# Altium PCB loight_sensor.PcbDoc
Units mm, origin at the board's own origin, x right, y up, seen from the top; angles counter-clockwise.
Board outline 33 x 15 mm, 2 copper layers (Top Layer, Bottom Layer); 6 components, 4 nets, 15 pads, 0 vias.
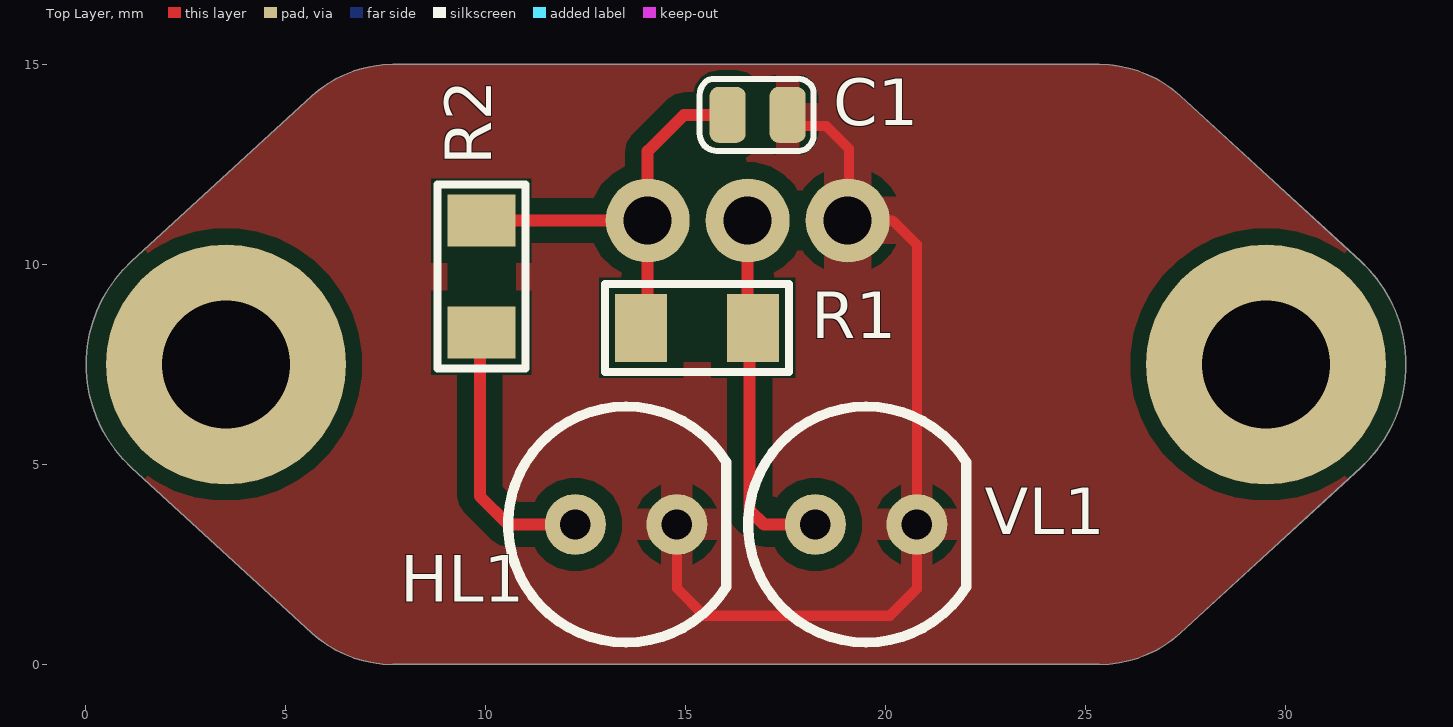
[diagram p0: Top Layer view]
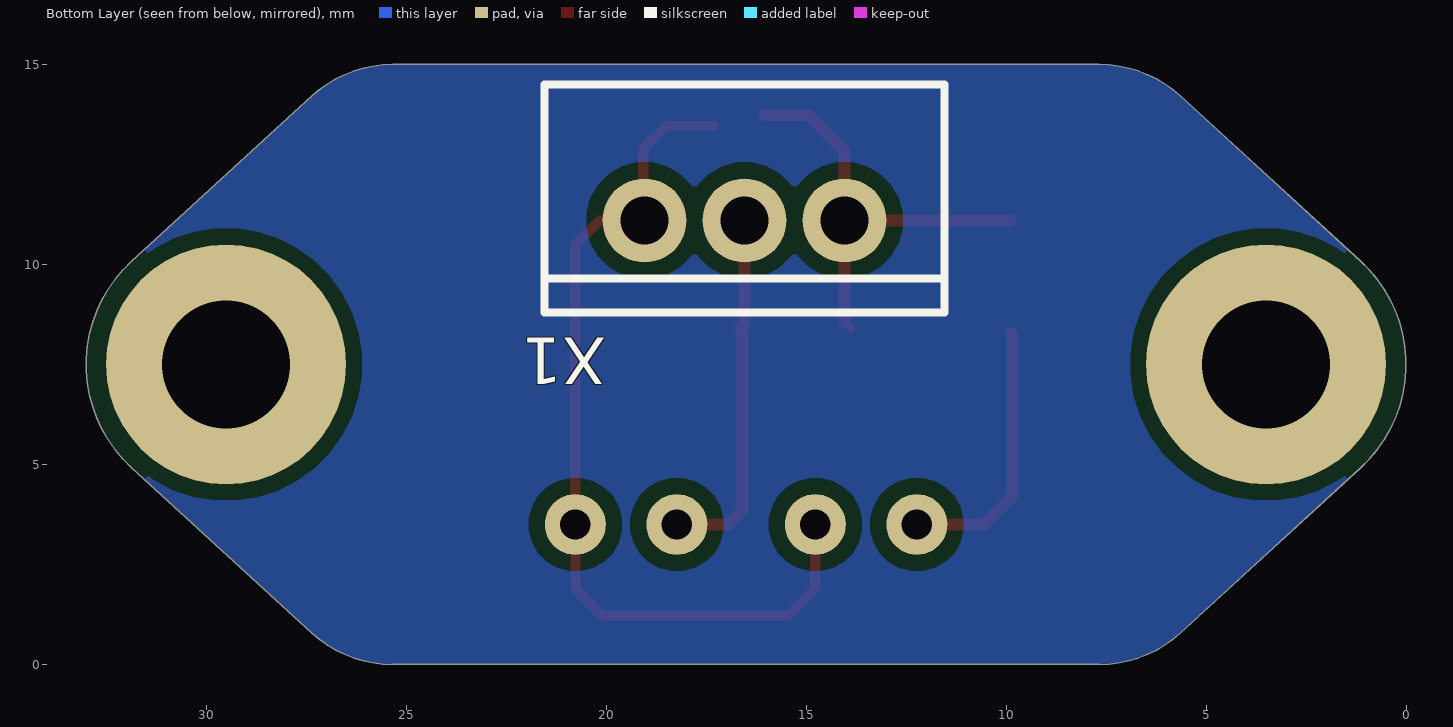
[diagram p1: Bottom Layer view, seen from below]
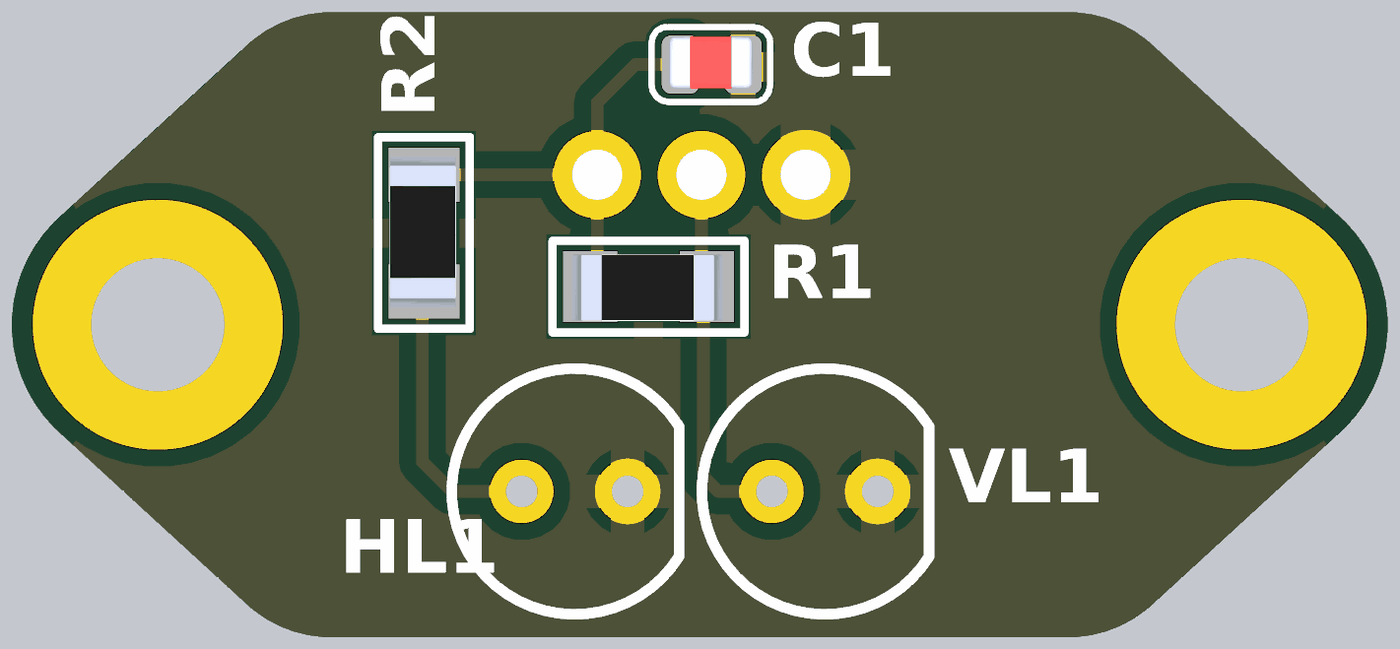
[diagram p2: 3D render of the assembled board from above, using the file's embedded part models]

## Layer stack, top to bottom
Top Solder: solder mask 0.0102, Solder Resist, Dk 3.5
Top Layer: signal copper 0.0356
Dielectric 1: dielectric 0.32, FR-4, Dk 4.8
Bottom Layer: signal copper 0.0356
Bottom Solder: solder mask 0.0102, Solder Resist, Dk 3.5

## Board outline
5.646,0.795 ccw(c7.674,3.006) 7.674,0.006 25.339,0.006 ccw(c25.339,3.006) 27.367,0.795 31.872,4.927 ccw(c29.506,7.506) 31.872,10.086 27.367,14.217 ccw(c25.339,12.006) 25.339,15.006 7.674,15.006 ccw(c7.674,12.006) 5.646,14.217 1.141,10.086 ccw(c3.506,7.506) 1.141,4.927

## Design rules (kind name [scope] priority, off if disabled: settings)
Clearance Clearance_1 [IsPadHoleValid] p1: gap=0.4 ignorepadtopadclearanceinfootprint=FALSE except(0.2: Arc-Arc Arc-Track Arc-SMDPad Arc-THPad Arc-Hole Track-Track Track-SMDPad Track-THPad Track-Hole SMDPad-Hole THPad-Hole Fill-Hole Poly-Hole Region-Hole Text-Text Text-Hole)
Clearance Clearance_Edge_Mid [((OnLayer('Signal Layer 1') OR OnLayer('Signal Layer 2')OR OnLayer('Signal Layer 3')OR OnLayer('Signal Layer 4'))) vs (OnLayer('Keep-Out Layer'))] p2: gap=0.25 ignorepadtopadclearanceinfootprint=FALSE
Clearance Clearance_Edge [All vs (OnLayer('Keep-Out Layer'))] p3: gap=0.25 ignorepadtopadclearanceinfootprint=FALSE
Clearance Via [IsVia vs IsVia] p4: gap=0.2 ignorepadtopadclearanceinfootprint=FALSE
Clearance Clearance_Poly_top [InPolygon AND (OnLayer('Top Layer') OR OnLayer('Bottom Layer'))] p5: gap=0.4 ignorepadtopadclearanceinfootprint=FALSE
Clearance Clearance_Poly_Mid [InPolygon AND (OnLayer('Signal Layer 1') OR OnLayer('Signal Layer 2') OR OnLayer('Signal Layer 3') OR OnLayer('Signal Layer 4'))] p6: gap=0.3 ignorepadtopadclearanceinfootprint=FALSE except(0.2: Via-Fill Via-Poly Via-Region)
Clearance [All] p7: gap=0.2 ignorepadtopadclearanceinfootprint=FALSE
ComponentClearance [All] p1: gap=0 collisioncheckmode=3 verticalgap=0 showdistances=FALSE
DiffPairsRouting [All] p1: maxlimit=0.254 minlimit=0.1 mostfreqgap=0.2 toplayer_minwidth=0.1 toplayer_maxwidth=0.381 toplayer_prefwidth=0.1 bottomlayer_minwidth=0.1 bottomlayer_maxwidth=0.381 bottomlayer_prefwidth=0.1 maxuncoupledlength=12.7
Height [All] p1: minheight=0 maxheight=30 prefheight=0
HoleSize [All] p1: absolutevalues=TRUE maxlimit=10 minlimit=0.2 maxpercent=80.000 minpercent=20.000
HoleToHoleClearance [All] p1: gap=0.2 allowstackedmicrovias=TRUE
MatchedLengths MatchedLengths_CSI2 [InDifferentialPairClass('MIPI_TX')] p1: tolerance=1 checknetsindiffpair=FALSE checkdiffpairvsdiffpair=TRUE checkxsignals=TRUE checkothers=TRUE
MatchedLengths MatchedLengths_CSI1 [InDifferentialPairClass('MIPI_CSI23')] p2: tolerance=1 checknetsindiffpair=FALSE checkdiffpairvsdiffpair=TRUE checkxsignals=TRUE checkothers=TRUE
MatchedLengths MatchedLengths_CSI0 [InDifferentialPairClass('MIPI_CSI0')] p3: tolerance=1 checknetsindiffpair=FALSE checkdiffpairvsdiffpair=TRUE checkxsignals=TRUE checkothers=TRUE
MatchedLengths [InDifferentialPairClass('All Differential Pairs')] p4: tolerance=0.5 checknetsindiffpair=TRUE checkdiffpairvsdiffpair=FALSE checkxsignals=FALSE checkothers=FALSE
MinimumSolderMaskSliver [All] p1: minsoldermaskwidth=0.05
PlaneClearance [All] p1: clearance=0.5
PlaneConnect [All] p1: planeconnectstyle=Relief reliefexpansion=0.5 reliefentries=4 reliefconductorwidth=0.2 reliefairgap=0.2
PolygonConnect PolygonConnect_<=0.3 [(AsMM(PadXSize_AllLayers)<=0.301) or (AsMM(PadYSize_AllLayers)<=0.301)] p1: thpad.connectstyle=Relief thpad.reliefconductorwidth=0.2 thpad.reliefentries=4 thpad.polygonreliefangle="90 Angle" thpad.airgapwidth=0.2 smdpad.connectstyle=Relief smdpad.reliefconductorwidth=0.2 smdpad.reliefentries=4 smdpad.polygonreliefangle="90 Angle" smdpad.airgapwidth=0.2 via.connectstyle=Direct via.reliefconductorwidth=0.2 via.reliefentries=4 via.polygonreliefangle="90 Angle" via.airgapwidth=0.2
PolygonConnect PolygonConnect_<=0.4 [(AsMM(PadXSize_AllLayers)<=0.401) or (AsMM(PadYSize_AllLayers)<=0.401)] p2: thpad.connectstyle=Relief thpad.reliefconductorwidth=0.26 thpad.reliefentries=4 thpad.polygonreliefangle="90 Angle" thpad.airgapwidth=0.2 smdpad.connectstyle=Relief smdpad.reliefconductorwidth=0.26 smdpad.reliefentries=4 smdpad.polygonreliefangle="90 Angle" smdpad.airgapwidth=0.2 via.connectstyle=Direct via.reliefconductorwidth=0.26 via.reliefentries=4 via.polygonreliefangle="90 Angle" via.airgapwidth=0.2
PolygonConnect PolygonConnect_<=0.6 [(AsMM(PadXSize_AllLayers)<=0.601) or (AsMM(PadYSize_AllLayers)<=0.601)] p3: thpad.connectstyle=Relief thpad.reliefconductorwidth=0.33 thpad.reliefentries=4 thpad.polygonreliefangle="90 Angle" thpad.airgapwidth=0.2 smdpad.connectstyle=Relief smdpad.reliefconductorwidth=0.33 smdpad.reliefentries=4 smdpad.polygonreliefangle="90 Angle" smdpad.airgapwidth=0.2 via.connectstyle=Direct via.reliefconductorwidth=0.33 via.reliefentries=4 via.polygonreliefangle="90 Angle" via.airgapwidth=0.2
PolygonConnect PolygonConnect_<=0.8 [(AsMM(PadXSize_AllLayers)<=0.8)or(AsMM(PadYSize_AllLayers)<=0.8)] p4: thpad.connectstyle=Relief thpad.reliefconductorwidth=0.53 thpad.reliefentries=4 thpad.polygonreliefangle="90 Angle" thpad.airgapwidth=0.3 smdpad.connectstyle=Relief smdpad.reliefconductorwidth=0.53 smdpad.reliefentries=4 smdpad.polygonreliefangle="90 Angle" smdpad.airgapwidth=0.3 via.connectstyle=Direct via.reliefconductorwidth=0.53 via.reliefentries=4 via.polygonreliefangle="90 Angle" via.airgapwidth=0.3
PolygonConnect PolygonConnect_<=1 [(AsMM(PadXSize_AllLayers)<=1.01)or(AsMM(PadYSize_AllLayers)<=1.01)] p5: thpad.connectstyle=Relief thpad.reliefconductorwidth=0.6 thpad.reliefentries=4 thpad.polygonreliefangle="90 Angle" thpad.airgapwidth=0.3 smdpad.connectstyle=Relief smdpad.reliefconductorwidth=0.6 smdpad.reliefentries=4 smdpad.polygonreliefangle="90 Angle" smdpad.airgapwidth=0.3 via.connectstyle=Direct via.reliefconductorwidth=0.6 via.reliefentries=4 via.polygonreliefangle="90 Angle" via.airgapwidth=0.3
PolygonConnect PolygonConnect_<=1.3 [(AsMM(PadXSize_AllLayers)<=1.31)or(AsMM(PadYSize_AllLayers)<=1.31)] p6: thpad.connectstyle=Relief thpad.reliefconductorwidth=0.66 thpad.reliefentries=4 thpad.polygonreliefangle="90 Angle" thpad.airgapwidth=0.3 smdpad.connectstyle=Relief smdpad.reliefconductorwidth=0.66 smdpad.reliefentries=4 smdpad.polygonreliefangle="90 Angle" smdpad.airgapwidth=0.3 via.connectstyle=Direct via.reliefconductorwidth=0.66 via.reliefentries=4 via.polygonreliefangle="90 Angle" via.airgapwidth=0.3
PolygonConnect PolygonConnect_<=1.6 [(AsMM(PadXSize_AllLayers)<=1.61)or(AsMM(PadYSize_AllLayers)<=1.61)] p7: thpad.connectstyle=Relief thpad.reliefconductorwidth=0.8 thpad.reliefentries=4 thpad.polygonreliefangle="90 Angle" thpad.airgapwidth=0.3 smdpad.connectstyle=Relief smdpad.reliefconductorwidth=0.8 smdpad.reliefentries=4 smdpad.polygonreliefangle="90 Angle" smdpad.airgapwidth=0.3 via.connectstyle=Direct via.reliefconductorwidth=0.8 via.reliefentries=4 via.polygonreliefangle="90 Angle" via.airgapwidth=0.3
PolygonConnect PolygonConnect_<=1.8 [(AsMM(PadXSize_AllLayers)<=1.8)or(AsMM(PadYSize_AllLayers)<=1.8)] p8: thpad.connectstyle=Relief thpad.reliefconductorwidth=1 thpad.reliefentries=4 thpad.polygonreliefangle="90 Angle" thpad.airgapwidth=0.3 smdpad.connectstyle=Relief smdpad.reliefconductorwidth=1 smdpad.reliefentries=4 smdpad.polygonreliefangle="90 Angle" smdpad.airgapwidth=0.3 via.connectstyle=Direct via.reliefconductorwidth=1 via.reliefentries=4 via.polygonreliefangle="90 Angle" via.airgapwidth=0.3
PolygonConnect PolygonConnect_<=2 [(AsMM(PadXSize_AllLayers)<=2.01)or(AsMM(PadYSize_AllLayers)<=2.01)] p9: thpad.connectstyle=Relief thpad.reliefconductorwidth=1.1 thpad.reliefentries=4 thpad.polygonreliefangle="90 Angle" thpad.airgapwidth=0.3 smdpad.connectstyle=Relief smdpad.reliefconductorwidth=1.1 smdpad.reliefentries=4 smdpad.polygonreliefangle="90 Angle" smdpad.airgapwidth=0.3 via.connectstyle=Direct via.reliefconductorwidth=1.1 via.reliefentries=4 via.polygonreliefangle="90 Angle" via.airgapwidth=0.3
PolygonConnect PolygonConnect_<=2.3 [(AsMM(PadXSize_AllLayers)<=2.31)or(AsMM(PadYSize_AllLayers)<=2.31)] p10: thpad.connectstyle=Relief thpad.reliefconductorwidth=1.2 thpad.reliefentries=4 thpad.polygonreliefangle="90 Angle" thpad.airgapwidth=0.3 smdpad.connectstyle=NoConnect smdpad.reliefconductorwidth=1.2 smdpad.reliefentries=4 smdpad.polygonreliefangle="90 Angle" smdpad.airgapwidth=0.3 via.connectstyle=Direct via.reliefconductorwidth=1.2 via.reliefentries=4 via.polygonreliefangle="90 Angle" via.airgapwidth=0.3
PolygonConnect PolygonConnect_<=2.5 [(AsMM(PadXSize_AllLayers)<=2.51)or(AsMM(PadYSize_AllLayers)<=2.51)] p11: thpad.connectstyle=Relief thpad.reliefconductorwidth=1.2 thpad.reliefentries=4 thpad.polygonreliefangle="90 Angle" thpad.airgapwidth=0.3 smdpad.connectstyle=Relief smdpad.reliefconductorwidth=1.2 smdpad.reliefentries=4 smdpad.polygonreliefangle="90 Angle" smdpad.airgapwidth=0.3 via.connectstyle=Direct via.reliefconductorwidth=1.2 via.reliefentries=4 via.polygonreliefangle="90 Angle" via.airgapwidth=0.3
PolygonConnect PolygonConnect_<=2.7 [(AsMM(PadXSize_AllLayers)<=2.71)or(AsMM(PadYSize_AllLayers)<=2.71)] p12: thpad.connectstyle=Relief thpad.reliefconductorwidth=1.4 thpad.reliefentries=4 thpad.polygonreliefangle="90 Angle" thpad.airgapwidth=0.3 smdpad.connectstyle=Relief smdpad.reliefconductorwidth=1.4 smdpad.reliefentries=4 smdpad.polygonreliefangle="90 Angle" smdpad.airgapwidth=0.3 via.connectstyle=Direct via.reliefconductorwidth=1.4 via.reliefentries=4 via.polygonreliefangle="90 Angle" via.airgapwidth=0.3
PolygonConnect PolygonConnect_<=3 [(AsMM(PadXSize_AllLayers)<=3.01)or(AsMM(PadYSize_AllLayers)<=3.01)] p13: thpad.connectstyle=Relief thpad.reliefconductorwidth=1.6 thpad.reliefentries=4 thpad.polygonreliefangle="90 Angle" thpad.airgapwidth=0.3 smdpad.connectstyle=Relief smdpad.reliefconductorwidth=1.6 smdpad.reliefentries=4 smdpad.polygonreliefangle="90 Angle" smdpad.airgapwidth=0.3 via.connectstyle=Direct via.reliefconductorwidth=1.6 via.reliefentries=4 via.polygonreliefangle="90 Angle" via.airgapwidth=0.3
PolygonConnect PolygonConnect_<7 [(AsMM(PadXSize_AllLayers)<7.01)or(AsMM(PadYSize_AllLayers)<=7.01)] p14: thpad.connectstyle=Relief thpad.reliefconductorwidth=2 thpad.reliefentries=4 thpad.polygonreliefangle="90 Angle" thpad.airgapwidth=0.4 smdpad.connectstyle=Relief smdpad.reliefconductorwidth=2 smdpad.reliefentries=4 smdpad.polygonreliefangle="90 Angle" smdpad.airgapwidth=0.4 via.connectstyle=Direct via.reliefconductorwidth=2 via.reliefentries=4 via.polygonreliefangle="90 Angle" via.airgapwidth=0.4
PolygonConnect [All] p15: thpad.connectstyle=Relief thpad.reliefconductorwidth=0.25 thpad.reliefentries=4 thpad.polygonreliefangle="90 Angle" thpad.airgapwidth=0.2 smdpad.connectstyle=Relief smdpad.reliefconductorwidth=0.25 smdpad.reliefentries=4 smdpad.polygonreliefangle="90 Angle" smdpad.airgapwidth=0.2 via.connectstyle=Direct via.reliefconductorwidth=0.25 via.reliefentries=4 via.polygonreliefangle="90 Angle" via.airgapwidth=0.2
RoutingCorners [All] p1: cornerstyle=45-Degree minsetback=2.5 maxsetback=2.5
RoutingVias [All] p1: holewidth=0.2 width=0.4 viastyle="Through Hole" minholewidth=0.2 minwidth=0.4 maxholewidth=3 maxwidth=4
ShortCircuit ShortCircuit_NoNet [InNet('No Net') vs InNet('No Net')] p1: allowed=TRUE
ShortCircuit ShortCircuit_GND [InNetClass('GND') vs InNetClass('GND')] p2: allowed=TRUE
ShortCircuit [All] p3: allowed=FALSE
SilkToSilkClearance [All] p1: silktosilkclearance=0
SilkToSolderMaskClearance SilkscreenOverComponentPads [IsPad] p1: minsilkscreentomaskgap=0 clearancetoexposedcopper=TRUE
SolderMaskExpansion SolderMaskExpansion_Via [IsVia] p1: expansion=0 istentingtop=FALSE
SolderMaskExpansion [All] p2: expansion=0.025 istentingtop=FALSE
UnConnectedPin [IsVia] p1:
Width [All] p1: maxlimit=3 minlimit=0.1 preferedwidth=0.1 minimp=50.000000 maximp=50.000000 favimp=50.000000
18 further rules are at their usual default settings.

## Classes and differential pairs
component class Sheet1: C1 HL1 R1 R2 X1

## Components (designator, comment, footprint, x,y, rotation, side; value= is the part's Value field where it differs from the comment)
C1 "" C0805_AA 16.795,13.75 r0 top
HL1 "" PCBComponent_2 13.506,3.506 r0 top
R1 "" R1206 15.252,8.396 r180 top
R2 "" R1206 9.866,9.733 r90 top
VL1 "" PCBComponent_1 19.506,3.506 r0 top
X1 "CWF-3" CWF-3 16.546,11.656 r90 bottom

## Footprints (in the part's own frame and the unit in brackets; to place one, negate y for a bottom-side part, rotate by r counter-clockwise, add the part's x,y. Pads: shape width x height; smd on the part's side, far side on the other; paste and mask are expansions set on the pad)
C0805_AA [mm]
  rrect50% 0.9x1.4 smd: 1(-0.75,0) 2(0.75,0)
  silkscreen extent -1.45,-0.9 1.4,0.9, body extent -1.02,-0.58 0.97,0.68, height 0.78
CWF-3 [mm]
  round 2.1 hole 1.2: 1(-0.55,-2.5) 2(-0.55,0) 3(-0.55,2.5)
  silkscreen extent -2.85,-5 2.85,5, body extent -2.9,-5 2.8,5, height 7.7
PCBComponent_1 [mil]
  round 60 hole 30: 1(-50,0) 2(50,0)
  silkscreen extent -116,-116 98,116, body extent -100,-100 100,100, height 339
PCBComponent_2 [mil]
  round 60 hole 30: 1(-50,0) 2(50,0)
  silkscreen extent -116,-116 98,116, body extent -100,-100 100,100, height 339
R1206 [mm]
  rect 1.3x1.7 smd: 1(-1.428,-0.024) 2(1.372,-0.024)
  Top Layer pour cut-out: -0.775,0.825 0.725,0.825 0.725,-0.875 -0.775,-0.875
  silkscreen extent -2.32,-1.12 2.27,1.07, body extent -1.8,-0.8 1.8,0.8, height 0.55

## Part data
C1: library part "Конденсатор кер.", "Конденсатор кер."
HL1: library part "IR LED"
R1 R2: library part "Резистор  0,05Вт", "Резистор 0,05Вт", Power rating=0,05Вт
VL1: library part phototransistor
X1: library part Header_3_plg, "Разъем - 3 конт. вилка", Contact_1=VCC, Contact_2=SIGN, Contact_3=GND, Name=CWF-3

## Free pads (board coordinates)
  round 6 hole 3.2: 0(3.506,7.506) 0(29.506,7.506)

## Nets (pads, with @x,y where several pads share a name; then routed paths per layer and width w, separated by ;. In a path a pad name is that pad's centre, name@x,y a point inside that pad or via, vN(x,y) a via of type N, cw(c..) or ccw(c..) an arc to the next point about the centre after c; other vN are vias at no path point)
+5В: C1.1 R1.2 R2.2 X1.1 | length 11
  Top Layer w0.2: R2.2 R2.2@9.891,11.106 ; R1.2 R1.2@14.046,8.586
  Top Layer w0.3: R2.2@9.891,11.106 X1.1 ; R1.2@14.046,8.586 X1.1 ; C1.1 14.955,13.75 14.046,12.841 X1.1
ANALOG_OUT: R1.1 VL1.1 X1.2 | length 9.1
  Top Layer w0.254: R1.1@16.546,8.554 R1.1 R1.1@16.595,8.335
  Top Layer w0.3: R1.1@16.546,8.554 X1.2 ; R1.1@16.595,8.335 16.595,3.865 16.954,3.506 VL1.1
GND: C1.2 HL1.2 VL1.2 X1.3 | length 22.5
  Top Layer w0.254: HL1.2 14.776,1.909 15.46,1.225 20.1,1.225 20.775,1.9 20.775,3.505 VL1.2 20.776,10.499 20.169,11.106 X1.3 19.08,11.14 19.08,12.9 18.51,13.47 C1.2@17.315,13.47
NetHL1_1: HL1.1 R2.1 | length 6.8
  Top Layer w0.254: R2.1@9.85,8.265 R2.1
  Top Layer w0.3: R2.1@9.85,8.265 9.85,4.215 10.559,3.506 HL1.1

## Polygon pours and split planes (outlines as drawn)
GND on Top Layer "GND_L01_P000" (solid, pour order 0): 7.535,0.006 cw(c7.694,3.073) 5.463,0.963 1.138,4.929 cw(c3.499,7.503) 0.006,7.478 cw(c3.514,7.503) 1.141,10.086 5.463,14.034 cw(c7.674,12.016) 7.535,15.006 25.46,15.006 cw(c25.332,11.999) 27.367,14.217 31.872,10.086 cw(c29.506,7.506) 33.006,7.533 cw(c29.506,7.506) 31.872,4.927 27.367,0.795 cw(c25.329,3.017) 25.48,0.006
no net on Bottom Layer "NONET_L02_P001" (solid, pour order 1): 7.667,0 cw(c7.69,3.024) 5.646,0.795 0.964,5.089 cw(c3.54,7.508) 0.01,7.343 cw(c3.506,7.506) 1.141,10.086 5.446,14.034 cw(c7.696,11.932) 7.87,15.006 25.345,15 cw(c25.344,11.966) 27.55,14.049 31.872,10.086 cw(c29.506,7.506) 33.003,7.343 cw(c29.506,7.506) 31.872,4.927 27.55,0.963 cw(c25.345,3.004) 25.345,0

## Silkscreen, mask and mechanical layers (free items; w line width, h text height)
Mechanical 1:
  circle w0.013: c14.776,3.506 r0.325
  circle w0.013: c13.966,11.106 r0.325
  circle w0.013: c16.506,11.106 r0.325
  circle w0.013: c12.236,3.506 r0.325
  circle w0.013: c18.236,3.506 r0.325
  circle w0.013: c29.506,7.506 r1.5
  circle w0.013: c19.046,11.106 r0.325
  circle w0.013: c3.506,7.506 r1.5
  circle w0.013: c20.776,3.506 r0.325
  lines w0.013: 1.141,4.927 cw(c3.506,7.506) 1.141,10.086 5.646,14.217 cw(c7.674,12.006) 7.674,15.006 25.339,15.006 cw(c25.339,12.006) 27.367,14.217 31.872,10.086 cw(c29.506,7.506) 31.872,4.927 27.367,0.795 cw(c25.339,3.006) 25.339,0.006 7.674,0.006 cw(c7.674,3.006) 5.646,0.795 1.141,4.927
  lines w0.2: 1.141,4.927 cw(c3.506,7.506) 1.141,10.086 5.646,14.217 cw(c7.674,12.006) 7.674,15.006 25.339,15.006 cw(c25.339,12.006) 27.367,14.217 31.872,10.086 cw(c29.506,7.506) 31.872,4.927 27.367,0.795 cw(c25.339,3.006) 25.339,0.006 7.674,0.006 cw(c7.674,3.006) 5.646,0.795 1.141,4.927